# Altium PCB NTC_Head_2.PcbDoc
Units mm, origin at the board's own origin, x right, y up, seen from the top; angles counter-clockwise.
Board outline 13.97 x 16.51 mm, 2 copper layers (Top Layer, Bottom Layer); 1 components, 13 nets, 28 pads, 6 vias.
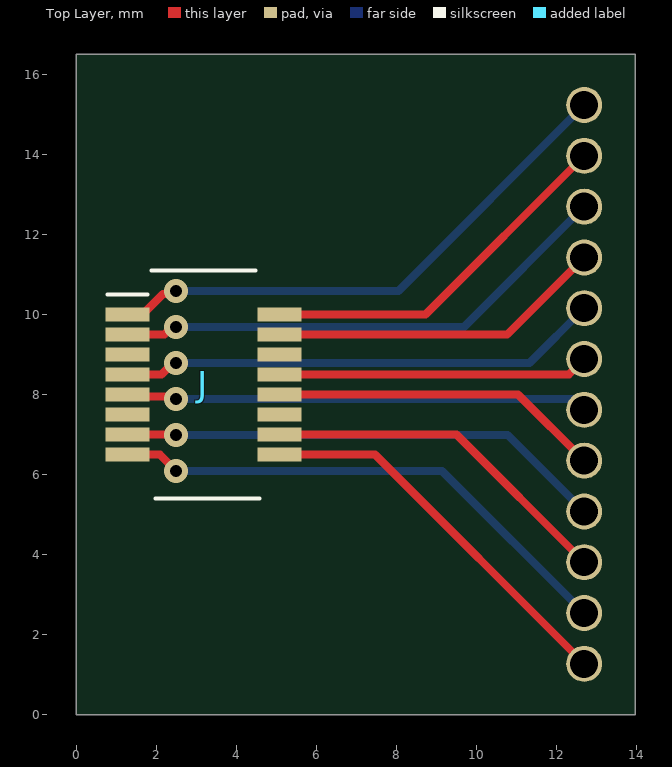
[diagram p0: Top Layer view]
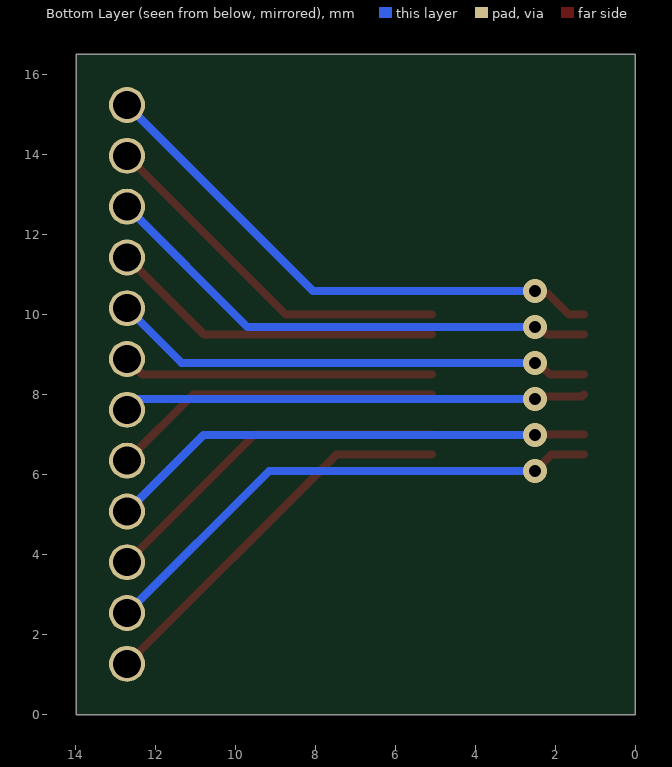
[diagram p1: Bottom Layer view, seen from below]

## Layer stack, top to bottom
Top Solder Mask: solder mask 0.0102, Solder Resist, Dk 3.5
Top Layer: signal copper 0.035
Dielectric 1: dielectric 0.32, FR-4, Dk 4.8
Bottom Layer: signal copper 0.035
Bottom Solder Mask: solder mask 0.0102, Solder Resist, Dk 3.5

## Board outline
0,0 0,16.51 13.97,16.51 13.97,0

## Design rules (kind name [scope] priority, off if disabled: settings)
Clearance [All] p1: gap=0.15 ignorepadtopadclearanceinfootprint=FALSE except(0: Arc-Hole Track-Hole SMDPad-Hole THPad-Hole Via-Hole Fill-Hole Poly-Hole Region-Hole Text-Hole)
ComponentClearance [All] p1 off: gap=0.254 collisioncheckmode=3 verticalgap=0.254 showdistances=FALSE
HoleSize [All] p1: absolutevalues=TRUE maxlimit=6.3 minlimit=0.3 maxpercent=80.000 minpercent=20.000
HoleToHoleClearance [All] p1: gap=0.45 allowstackedmicrovias=TRUE
PolygonConnect [All] p1: connectstyle=Relief reliefconductorwidth=0.25 reliefentries=4 polygonreliefangle="90 Angle" airgapwidth=0.25
RoutingVias [All] p1: holewidth=0.5 width=1 viastyle="Through Hole" minholewidth=0.3 minwidth=0.45 maxholewidth=6.3 maxwidth=10
SolderMaskExpansion [All] p1: expansion=0.102 istentingtop=FALSE
Width [All] p1: maxlimit=5 minlimit=0.15 preferedwidth=0.25 minimp=50.000000 maximp=50.000000 favimp=50.000000
27 further rules are at their usual default settings.

## Components (designator, comment, footprint, x,y, rotation, side; value= is the part's Value field where it differs from the comment)
J "5003340160" 5003340160 3.18,10.004 r270 top

## Footprints (in the part's own frame and the unit in brackets; to place one, negate y for a bottom-side part, rotate by r counter-clockwise, add the part's x,y. Pads: shape width x height; smd on the part's side, far side on the other; paste and mask are expansions set on the pad)
5003340160 [mm] "0.50mm Pitch SlimStack Plug, Surface Mount, Dual Row, Vertical, 2.50mm Stack Height, 16 Circuits"
  rect 0.35x1.1 smd mask+0.05: 1(0,-1.9) 2(0,1.9) 3(0.5,-1.9) 4(0.5,1.9) 5(1,-1.9) 6(1,1.9) 7(1.5,-1.9) 8(1.5,1.9) 9(2,-1.9) 10(2,1.9) 11(2.5,-1.9) 12(2.5,1.9) 13(3,-1.9) 14(3,1.9) 15(3.5,-1.9) 16(3.5,1.9)
  silkscreen extent -1.1,-2.4 4.6,1.4, body extent -0.97,-2.1 4.48,2.1, height 1.58

## Part data
J: "0.50mm Pitch SlimStack Plug, Surface Mount, Dual Row, Vertical, 2.50mm Stack Height, 16 Circuits"

## Free pads (board coordinates)
  round 0.9 hole 0.7: 57(12.7,13.97) 58(12.7,12.7) 59(12.7,11.43) 60(12.7,10.16) 61(12.7,8.89) 62(12.7,3.81) 63(12.7,7.62) 64(12.7,6.35) 65(12.7,5.08) 66(12.7,2.54) 67(12.7,15.24) 68(12.7,1.27)

## Via types
v1: diameter 0.6, hole 0.3, Top Layer to Bottom Layer, 6 vias

## Nets (pads, with @x,y where several pads share a name; then routed paths per layer and width w, separated by ;. In a path a pad name is that pad's centre, name@x,y a point inside that pad or via, vN(x,y) a via of type N, cw(c..) or ccw(c..) an arc to the next point about the centre after c; other vN are vias at no path point)
GND: 
IN_1: J.1 pad.67 | length 13.6
  Top Layer w0.2: J.1 1.655,10.004 2.168,10.517 2.423,10.517 v1(2.5,10.594)
  Bottom Layer w0.2: v1(2.5,10.594) 8.054,10.594 pad.67
IN_2: J.3 pad.58 | length 12.7
  Top Layer w0.2: J.3 2.202,9.504 2.392,9.694 v1(2.5,9.694)
  Bottom Layer w0.2: v1(2.5,9.694) 9.694,9.694 pad.58
IN_3: J.7 pad.60 | length 12.1
  Top Layer w0.2: J.7 2.13,8.504 2.42,8.794 v1(2.5,8.794)
  Bottom Layer w0.2: v1(2.5,8.794) 11.334,8.794 pad.60
IN_4: J.9 pad.63 | length 11.6
  Top Layer w0.2: J.9 1.335,7.949 2.445,7.949 v1(2.5,7.894)
  Bottom Layer w0.2: v1(2.5,7.894) 12.426,7.894 pad.63
IN_5: J.13 pad.65 | length 12.2
  Top Layer w0.2: J.13 1.285,6.999 2.495,6.999 v1(2.5,6.994)
  Bottom Layer w0.2: v1(2.5,6.994) 10.786,6.994 pad.65
IN_6: J.15 pad.66 | length 13.1
  Top Layer w0.2: J.15 2.09,6.504 v1(2.5,6.094)
  Bottom Layer w0.2: v1(2.5,6.094) 9.146,6.094 pad.66
sig_1: J.2 pad.57 | length 9.3
  Top Layer w0.2: J.2 8.734,10.004 pad.57
sig_2: J.4 pad.59 | length 8.4
  Top Layer w0.2: J.4 10.774,9.504 pad.59
sig_3: J.8 pad.61 | length 7.8
  Top Layer w0.2: J.8 12.314,8.504 pad.61
sig_4: J.10 pad.64 | length 8.3
  Top Layer w0.2: J.10 11.046,8.004 pad.64
sig_5: J.14 pad.62 | length 8.9
  Top Layer w0.2: J.14 9.506,7.004 pad.62
sig_6: J.16 pad.68 | length 9.8
  Top Layer w0.2: J.16 7.466,6.504 pad.68
pads on no net: J.5 J.6 J.11 J.12

## Silkscreen, mask and mechanical layers (free items; w line width, h text height)
Board Outline:
  the board outline again, w0.1